# Altium PCB MotorX5.PcbDoc
Units mm, origin at the board's own origin, x right, y up, seen from the top; angles counter-clockwise.
Board outline 36 x 80 mm, 2 copper layers (Top Layer, Bottom Layer); 45 components, 38 nets, 175 pads, 115 vias.
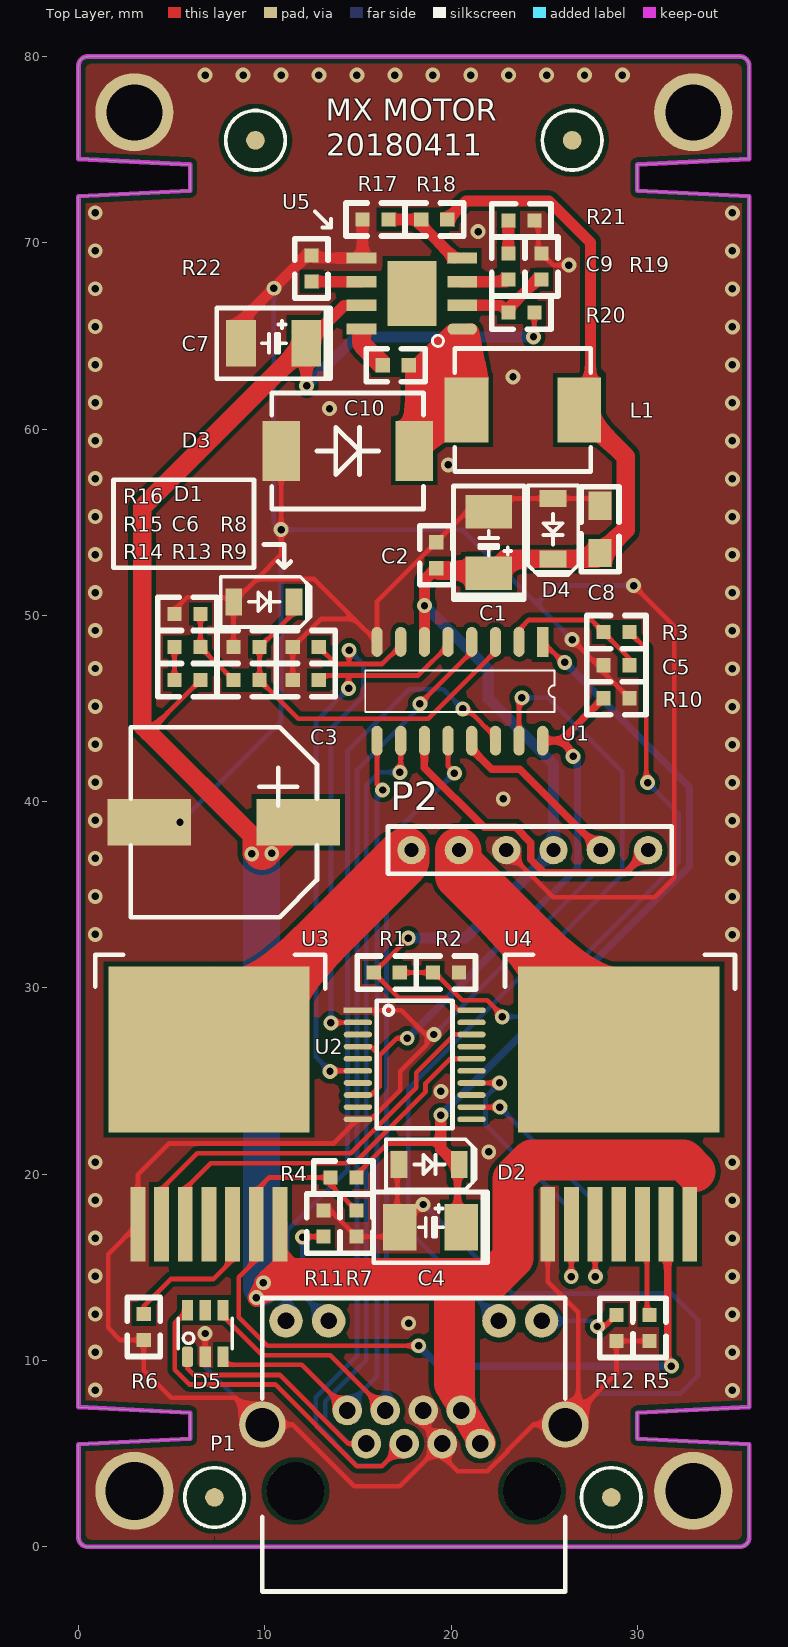
[diagram p0: Top Layer view]
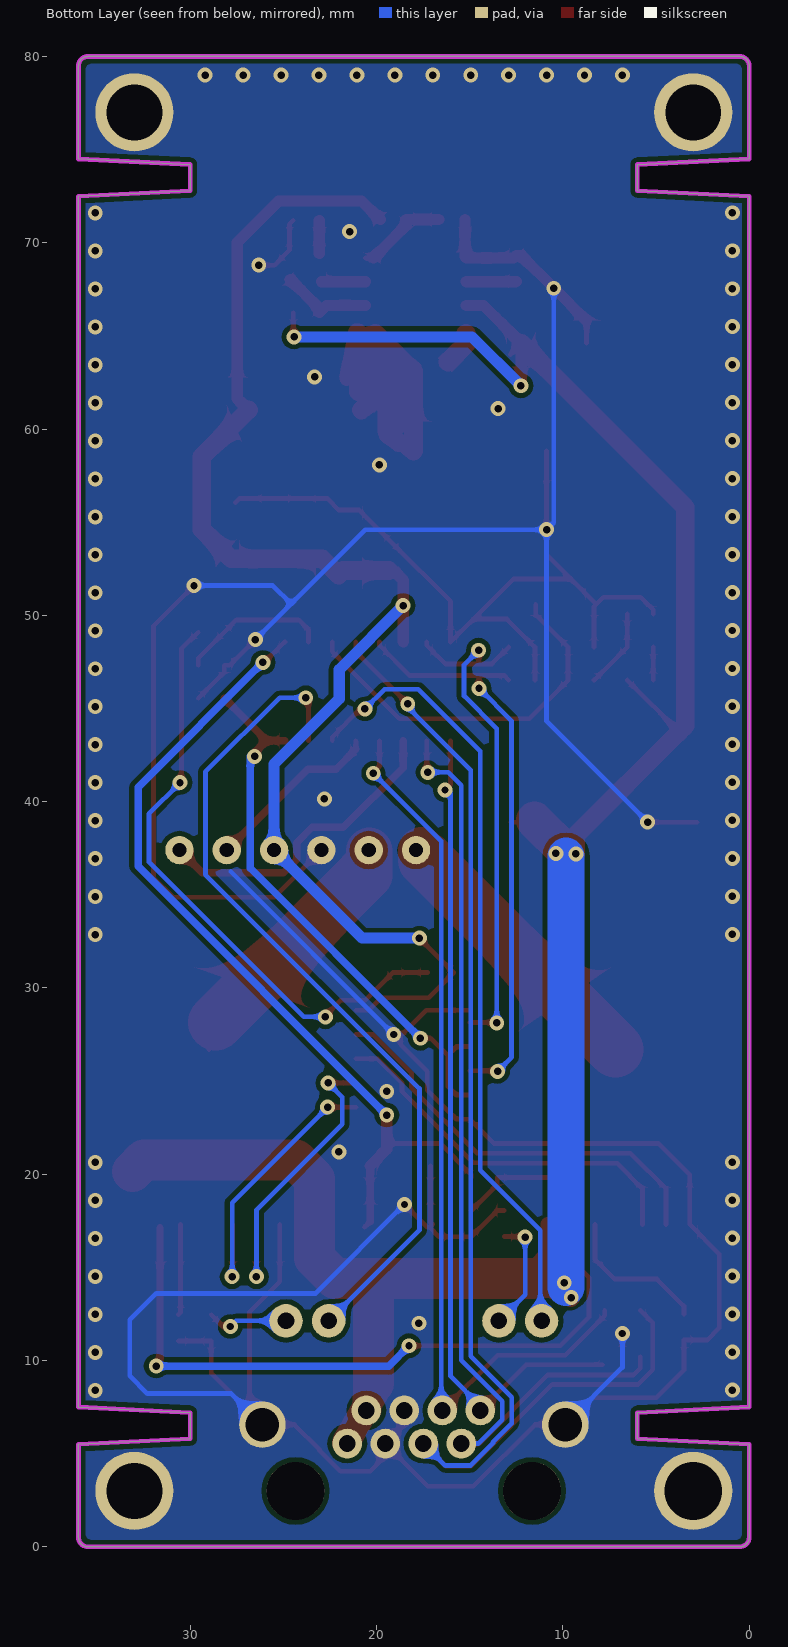
[diagram p1: Bottom Layer view, seen from below]

## Layer stack, top to bottom
Top Solder: solder mask 0.0102, Solder Resist, Dk 3.5
Top Layer: signal copper 0.0356
Dielectric 1: dielectric 0.32, FR-4, Dk 4.8
Bottom Layer: signal copper 0.0356
Bottom Solder: solder mask 0.0102, Solder Resist, Dk 3.5

## Board outline
0.5,0 cw(c0.5,0.5) 0,0.5 0,5.5 6,5.8 6,7.2 0,7.5 0,72.5 6,72.8 6,74.2 0,74.5 0,79.5 cw(c0.5,79.5) 0.5,80 35.5,80 cw(c35.5,79.5) 36,79.5 36,74.5 30,74.2 30,72.8 36,72.5 36,7.5 30,7.2 30,5.8 36,5.5 36,0.5 cw(c35.5,0.5) 35.5,0

## Design rules (kind name [scope] priority, off if disabled: settings)
Clearance [All] p1: gap=0.254 ignorepadtopadclearanceinfootprint=FALSE
ComponentClearance [All] p1 off: gap=0.254 collisioncheckmode=3 verticalgap=0.254 showdistances=FALSE
Height [All] p1 off: minheight=0 maxheight=25.4 prefheight=12.7
MinimumSolderMaskSliver [All] p1 off: minsoldermaskwidth=0.254
PlaneConnect [All] p1: planeconnectstyle=Direct reliefexpansion=0.508 reliefentries=4 reliefconductorwidth=0.254 reliefairgap=0.254
PolygonConnect [All] p1: connectstyle=Direct reliefconductorwidth=0.254 reliefentries=4 polygonreliefangle="90 Angle" airgapwidth=0.254
RoutingVias [All] p1: holewidth=1.5 width=1 viastyle="Through Hole" minholewidth=0.3 minwidth=0.8 maxholewidth=5 maxwidth=10
SilkToSilkClearance [All] p1 off: silktosilkclearance=0.254
SilkToSolderMaskClearance [IsPad] p1 off: minsilkscreentomaskgap=0.254 clearancetoexposedcopper=TRUE
SolderMaskExpansion [All] p1: expansion=0.102
Width [All] p1: maxlimit=5 minlimit=0.254 preferedwidth=0.254
24 further rules are at their usual default settings.

## Components (designator, comment, footprint, x,y, rotation, side; value= is the part's Value field where it differs from the comment)
C1 "10V 47uF 3528" 贴片电容3528_2#1 22.025,53.9 r90 top
C2 "0.01uF 0603" 0603 19.2,52.525 r90 top
C3 "cap贴片电解电容" 贴片电解电容（10*10.2mm） 7.8,38.9 r0 top locked
C4 "25V 10uF 3528" 贴片电容3528_2#1 18.9,17.15 r180 top
C5 "Cap" 0603 28.175,47.325 r0 top value=150pF
C6 "Cap" 0603 8.322,48.3 r0 top value=150pF
C7 "25V 10uF 3528" 贴片电容3528_2#2 10.475,64.6 r180 top
C8 "Cap" 0805 28,55.89 r270 top value="22uF 10V"
C9 "Cap" 0603 23.075,69.425 r270 top value=150pF
C10 "Cap" 0603 16.328,63.425 r0 top value=100nf
D1 "MMSZ5231B E1(5V1)" SOD-123_5 9.95,50.725 r0 top
D2 "MMSZ5231B E1(5V1)" SOD-123_5 18.825,20.525 r0 top
D3 "SK34" SK34 14.45,58.825 r0 top
D4 "MMSZ5231B E1(5V1)" SOD-123_5 25.475,54.65 r270 top
D5 "SRV05-4" sot-23-6(SRV05-4) 6.8,11.45 r0 top
L1 "15UH" 0630功率电感 23.85,61.025 r0 top
P1 "RJ45带扣带灯2" RJ45带扣带灯_2 18,3 r0 top locked
P2 "motor port" 2.54排针 24.23,37.4 r0 top
R1 "Res" 0603 17.25,30.825 r180 top value="热敏电阻10K NCP18XH103F03RB"
R2 "Res" 0603 20.425,30.825 r180 top value=10K
R3 "Res" 0603 29.572,49.1 r180 top value=1K
R4 "Res" 0603 13.525,19.825 r0 top value=1K
R5 "Res" 0603 30.65,11.053 r90 top value=1K
R6 "Res" 0603 3.5,11.1 r90 top value=1K
R7 "Res" 0603 14.925,16.65 r90 top value=10K
R8 "Res" 0603 11.5,48.3 r0 top value=1K
R9 "Res" 0603 11.503,46.525 r0 top value=1K
R10 "Res" 0603 29.575,45.55 r180 top value=1K
R11 "Res" 0603 13.15,16.653 r90 top value=1K
R12 "Res" 0603 28.875,12.45 r270 top value=1K
R13 "Res" 0603 8.325,46.525 r0 top value=1K
R14 "Res" 0603 5.15,46.525 r0 top value=10K
R15 "Res" 0603 6.547,48.3 r180 top value=10K
R16 "Res" 0603 5.15,50.075 r0 top value=10K
R17 "Res" 0603 15.25,71.25 r0 top value=40.2k
R18 "Res" 0603 18.403,71.25 r0 top value=210k
R19 "Res" 0603 24.85,69.425 r270 top value=24.9k
R20 "Res" 0603 23.075,66.25 r0 top value=100k
R21 "Res" 0603 24.472,71.2 r180 top value=100k
R22 "Res" 0603 12.5,69.322 r270 top value=100k
U1 "STC15W401AS_SOP16_DIP16" SOP16 24.92,48.575 r270 top
U2 "74HC244" TSSOP-20 15,28.8 r0 top
U3 "BTS 7960" TO-263-7 7,22 r0 top locked
U4 "BTS 7960" TO-263-7 29,22 r0 top locked
U5 "MP1584EN" MP1584EN 17.9,67.275 r90 top

## Footprints (in the part's own frame and the unit in brackets; to place one, negate y for a bottom-side part, rotate by r counter-clockwise, add the part's x,y. Pads: shape width x height; smd on the part's side, far side on the other; paste and mask are expansions set on the pad)
2.54排针 [mil]
  round 60 hole 30: 1(-250,0) 2(-150,0) 3(-50,0) 4(50,0) 5(150,0) 6(250,0)
  silkscreen extent -300,-50 300,50
0603 [mil]
  rect 30x30 smd: 1(0,0) 2(55,0)
  silkscreen extent -35,-35 90,35
0630功率电感 [mm]
  rect 2.35x3.5 smd: 1(-3.025,0) 2(3.025,0)
  silkscreen extent -3.65,-3.3 3.65,3.3
0805 [mm]
  rect 1.524x1.25 smd: 1(0,0) 2(2.54,0)
  silkscreen extent -1.02,-1.02 3.56,1.02
MP1584EN [mm]
  rect 3.51x2.62 smd: 0(0,0)
  oval 0.61x1.6 smd: 1(-1.905,-2.7)
  rect 0.61x1.6 smd: 2(-0.635,-2.7) 3(0.635,-2.7) 4(1.905,-2.7) 5(1.905,2.7) 6(0.635,2.7) 7(-0.635,2.7) 8(-1.905,2.7)
  silkscreen extent -2.84,-1.7 -2.24,-1.1
RJ45带扣带灯_2 [mm]
  round 3.1 hole 3.1: 0(-6.35,0) 0(6.35,0)
  round 1.6 hole 0.9: 1(3.57,2.54) 2(2.55,4.32) 3(1.53,2.54) 4(0.51,4.32) 5(-0.51,2.54) 6(-1.53,4.32) 7(-2.55,2.54) 8(-3.57,4.32)
  round 1.8 hole 0.89: 9(6.86,9.13) 10(4.57,9.13) 11(-4.57,9.13) 12(-6.86,9.13)
  round 2.5 hole 1.8: 13(-8.13,3.56) 13(8.13,3.56)
  silkscreen extent -8.13,-5.4 8.13,10.35
SK34 [mm]
  rect 2x3.2 smd: 1(-3.57,0) 2(3.57,0)
  silkscreen extent -4.07,-3.11 4.07,3.11
SOD-123_5 [mm]
  rect 0.9x1.45 smd: 1(-1.62,0) 2(1.62,0)
  silkscreen extent -2.32,-1.35 2.5,1.35
SOP16 [mm]
  rect 1.6x0.6 smd: 1(0,0)
  oval 1.6x0.6 smd: 2(0,-1.27) 3(0,-2.54) 4(0,-3.81) 5(0,-5.08) 6(0,-6.35) 7(0,-7.62) 8(0,-8.89) 9(5.3,-8.89) 10(5.3,-7.62) 11(5.3,-6.35) 12(5.3,-5.08) 13(5.3,-3.81) 14(5.3,-2.54) 15(5.3,-1.27) 16(5.3,0)
  silkscreen extent 1.53,-9.53 3.77,0.64
sot-23-6(SRV05-4) [mm]
  rrect50% 0.6x1.1 smd: 1(-0.95,-1.25)
  rect 0.6x1.1 smd: 2(0,-1.25) 3(0.95,-1.25) 4(0.95,1.25) 5(0,1.25) 6(-0.95,1.25)
  silkscreen extent -1.45,-0.8 1.45,0.8
TO-263-7 [mm]
  rect 0.8x4 smd: 1(-3.81,-4.697) 2(-2.54,-4.697) 3(-1.27,-4.697) 4(0,-4.697) 5(1.27,-4.697) 6(2.54,-4.697) 7(3.81,-4.697)
  rect 10.8x8.89 smd: 8(0,4.697)
  silkscreen extent -6.1,7.97 6.24,9.78
TSSOP-20 [mil]
  rect 60x12 smd: 1(0,0)
  oval 60x12 smd: 2(0,-25.59) 3(0,-51.18) 4(0,-76.77) 5(0,-102.36) 6(0,-127.95) 7(0,-153.54) 8(0,-179.13) 9(0,-204.72) 10(0,-230.32) 11(240.16,-230.32) 12(240.16,-204.72) 13(240.16,-179.13) 14(240.16,-153.54) 15(240.16,-127.95) 16(240.16,-102.36) 17(240.16,-76.77) 18(240.16,-51.18) 19(240.16,-25.59) 20(240.16,0)
  silkscreen extent 40,-249 200,20
贴片电容3528_2#1 [mm]
  rect 1.8x2.5 smd: 1(-1.65,0) 2(1.65,0)
  silkscreen extent -3.05,-1.9 3.05,1.9
贴片电容3528_2#2 [mm]
  rect 1.6x2.5 smd: 1(-1.75,0) 2(1.75,0)
  silkscreen extent -3.05,-1.9 3.05,1.9
贴片电解电容（10*10.2mm） [mm]
  rect 4.5x2.5 smd: 1(-4,0) 2(4,0)
  silkscreen extent -5,-5.1 5,5.1

## Part data
C1 C4 C7: library part 电容
C2: library part Cap, "Capacitor", LatestRevisionDate=17-Jul-2002, LatestRevisionNote="Re-released for DXP Platform.", PackageDescription="Radial Cap, Thru-Hole; 2 Leads; 0.3 in Pin Spacing", PackageReference=RAD-0.3, Published=8-Jun-2000, Publisher="Altium Limited"
C3: library part cap贴片电容, ="330uF 50V"
C5 C6 C8 C9 C10: "Capacitor", LatestRevisionDate=17-Jul-2002, LatestRevisionNote="Re-released for DXP Platform.", PackageReference=RAD-0.3, Published=8-Jun-2000, Publisher="Altium Limited"
D1 D2 D4: library part "Diode 1N4148", "High Conductance Fast Diode", Code_JEDEC=DO-204-AH, ComponentLink1Description="Manufacturer Link", ComponentLink1URL=http://www.fairchildsemi.com/, ComponentLink2Description=Datasheet, ComponentLink2URL=http://www.fairchildsemi.com/ds/1N%2F1N4148.pdf, DatasheetVersion=1997, LatestRevisionDate=17-Jul-2002, LatestRevisionNote="Re-released for DXP Platform.", PackageReference=DO-35, Published=8-Jun-2000, Publisher="Altium Limited"
L1: library part 0630功率电感
R1 R2 R3 R4 R5 R6 R7 R8 R9 R10 R11 R12 R13 R14 R15 R16 R17 R18 R19 R20 R21 R22: library part Res2, "Resistor", LatestRevisionDate=17-Jul-2002, LatestRevisionNote="Re-released for DXP Platform.", PackageReference=AXIAL-0.4, Published=8-Jun-2000, Publisher="Altium Limited"
U5: library part Component_1

## Free pads (board coordinates)
  round 4.2 hole 3.1: 0(3,3)
  round 4.2 hole 3: 0(3,77) 0(33,3) 0(33,77)
  round 1 smd: 0(7.3,2.65) 0(9.5,75.5) 0(26.5,75.5) 0(28.6,2.65)
  round 3 on Top Solder: 0(7.3,2.65) 0(9.5,75.5) 0(26.5,75.5) 0(28.6,2.65)

## Via types
v1: diameter 0.8, hole 0.4, Top Layer to Bottom Layer, 115 vias

## Nets (pads, with @x,y where several pads share a name; then routed paths per layer and width w, separated by ;. In a path a pad name is that pad's centre, name@x,y a point inside that pad or via, vN(x,y) a via of type N, cw(c..) or ccw(c..) an arc to the next point about the centre after c; other vN are vias at no path point)
5V: C1.1 C2.1 C8.2 D4.2 L1.2 P2.4 R1.2 R18.2 U1.6 U2.20 | length 75.5
  Top Layer w0.254: v1(17.7,32.675) 15.853,30.828 R1.2 17.203,29.475 19.75,29.475 20.425,28.8 U2.20 ; C1.1@21.8,52.375 C1.1@22.025,52.15
  Top Layer w0.6: U1.6 18.57,51.895 C2.1 ; R18.2 20.8,72.25 25.25,72.25 27.479,70.021 27.479,61.629 L1.2
  Top Layer w1: C2.1@19.35,52.41 C1.1@21.8,52.41 ; C1.1@22.025,52.15 22.905,53.03 D4.2 27.805,53.03 29.379,54.604 29.379,58.521 L1.2
  Bottom Layer w0.6: v1(17.7,32.675) 20.775,32.675 P2.4 25.5,42.025 22,45.525 22,47.1 v1(18.575,50.525)
12V: C3.2 C7.1 P1.1 P1.2 R14.2 R20.2 U3.7 U4.7 U5.7 | length 132.1
  Top Layer w0.254: 3.647,43.625 3.761,43.739 R14.2 R14.2@6.547,46.522 ; 10.475,14.725 11.3,14.725 10.81,15.215 ; C3.2@12.05,38.9 C3.2@12.8,38.9 ; C7.1 C7.1@12.825,64 ; 20.425,14.404 20.55,14.279 ; P1.2@21.146,7.226 21.146,8.98 ; v1@24.472,64.95 R20.2
  Top Layer w0.6: v1@12.225,62.325 C7.1 14.265,66.64 U5.7
  Top Layer w0.8: 10.81,15.215 U3.7 ; U3.7@11.01,15.453 11.75,14.85
  Top Layer w1: v1(9.3,37.2) 9.3,38.2 3.761,43.739 3.425,44.075 3.425,55.8 C7.1 ; v1(9.925,14.175) 9.975,14.225 9.947,14.165 9.575,13.375 10.159,13.623 11.225,14.075 ; v1@10.075,14.35 10.675,14.925 ; 10.9,13.85 11.6,13.85
  Top Layer w1.5: 19.989,8.422 20.624,7.385 20.634,7.367 21.644,5.585 P1.1@21.65,5.575 ; P1.2@20.495,7.34 20.552,7.329 P1.2@20.568,7.326 ; P1.1@21.618,5.569 P1.1@21.62,5.565
  Top Layer w2: 9.85,37.325 C3.2@11.525,39
  Top Layer w2.2: 11.621,14.404 20.175,14.404 ; 20.175,8.775 20.175,14.404 ; 33.1,20.15 32.475,20.775 24.345,20.775 23.325,19.755 23.325,15.5 22.229,14.404 20.425,14.404 20.175,14.404
  Bottom Layer w0.6: v1(12.25,62.325) 14.875,64.95 v1(24.425,64.95)
  Bottom Layer w2: v1@9.825,13.925 9.825,37.075
  other v1: 9.55,13.375 10.375,37.225
AD0: C4.1 D2.2 R4.2 U1.1 | length 46.1
  Top Layer w0.254: R4.2 14.922,19.981 16.591,21.65 19.45,21.65 ; C4.1@20.345,17.455 C4.1@20.65,17.15 ; U1.1 26.02,47.475 v1(26.1,47.475)
  Top Layer w0.4: C4.1@20.345,17.455 D2.2@20.345,20.45
  Top Layer w0.6: v1(19.45,23.175) 19.45,21.65 19.45,21.345 D2.2@20.345,20.45
  Bottom Layer w0.4: v1(19.45,23.175) 32.8,36.525 32.8,40.775 v1(26.1,47.475)
AD1: C5.2 R3.2 U1.2 | length 8
  Top Layer w0.254: U1.2 23.65,49.225 24.181,49.756 27.519,49.756 R3.2 29.569,47.706 C5.2@29.569,47.325
AD2: C6.2 D1.2 R13.2 U1.3 | length 20.3
  Top Layer w0.254: D1.2@11.45,50.6 11.45,50.031 C6.2 9.722,48.297 R13.2 11.791,44.456 18.781,44.456 22.38,48.055 U1.3
GND: C1.2 C2.2 C3.1 C4.2 C5.1 C6.1 C7.2 C8.1 D1.1 D2.1 D3.1 D4.1 D5.2 P1.3 P1.4 P1.13 P2.3 pad.0@3,3 pad.0@3,77 pad.0@33,3 pad.0@33,77 R2.1 R5.1 R6.1 R7.1 R8.1 R9.1 R10.1 R11.2 R12.2 R16.1 R17.1 R19.1 R21.1 R22.1 U1.8 U2.1 U2.10 U3.1 U4.1 U5.5 | length 292.4
  Top Layer w0.254: C3.1@2.8,38.9 C3.1 v1(5.45,38.9) ; R16.1 5.15,50.3 5.825,50.975 7.835,50.975 D1.1@8.21,50.6 ; D5.2 v1(6.8,11.45) ; C6.1 8.322,50.488 D1.1@8.21,50.6 ; C7.2 C7.2@8.725,65.8 ; D3.1 10.88,53.27 9.56,51.95 ; R9.1 11.5,46.528 R8.1 13,49.8 14.805,49.8 ; R22.1 R22.1@12.642,69.18 ; R11.2 13.525,18.05 R7.1 16.65,16.65 C4.2@17.15,17.15 ; U2.1 17.325,28.8 18.7,27.425 18.7,26.95 17.275,25.525 17.275,24.511 15.714,22.95 U2.10 13.7,21.65 4.875,21.65 3.19,19.965 U3.1 1.6,15.713 1.6,11.75 2.25,11.1 R6.1 3.5,9.475 4.975,8 8.43,8 9.87,6.56 11.49,6.56 14.8,3.25 17.24,3.25 P1.3 ; U5.5 U5.5@15.25,69.23 ; D2.1@17.105,20.45 17.105,17.43 16.988,17.313 C4.2@17.15,17.15 ; v1(18.5,18.375) 17.275,17.15 C4.2 C4.2@17.15,17.15 ; P1.4 18.51,6.56 P1.3 ; P2.3 P2.3 25.484,34.875 30.925,34.875 31.975,35.925 31.975,49.425 v1(29.8,51.6) ; R21.1 24.675,70.997 24.675,69.6 R19.1 25.475,68.8 v1(26.325,68.8) ; U4.1 25.19,14.235 26.825,12.6 P1.13@26.825,7.255 ; v1(26.5,48.7) 27.875,47.325 C5.1@28.172,47.325 ; C8.1@27.575,56.05 27.35,56.275 22.65,56.275 22.025,55.65 20.928,55.65 C2.2 16.03,50.752 U1.8 14.805,49.8 ; C5.1 C5.1@28.172,47.325 ; R10.1@29.572,45.55 28.172,46.95 C5.1@28.172,47.325 ; R5.1 R12.2 28.875,9.305 P1.13@26.825,7.255 ; D1.1@8.21,50.6 9.56,51.95 ; 9.56,51.95 12.655,51.95 14.805,49.8 ; P1.3 19.53,4.87 20.35,4.05 21.952,4.05 23.062,5.16 23.062,5.212 24.41,6.56 26.13,6.56 P1.13@26.825,7.255
  Top Layer w0.6: C7.2@8.725,65.8 v1(10.486,67.561) 12.247,69.322 R22.1 ; R22.1@12.642,69.18 U5.5 ; U5.5@15.25,69.23 R17.1
  Bottom Layer w0.254: v1(5.45,38.9) 10.875,44.325 v1(10.875,54.6) ; v1(6.8,11.45) 6.8,9.63 P1.13@9.87,6.56 ; v1(10.486,67.561) 10.486,54.989 v1(10.875,54.6) ; v1(18.5,18.375) 23.275,13.6 31.825,13.6 33.25,12.175 33.25,9.175 32.3,8.225 27.795,8.225 P1.13@26.13,6.56 ; v1(19.075,27.5) 27.825,36.25 ; v1(26.5,48.7) 24.587,50.612 ; v1(29.8,51.6) 25.575,51.6 24.587,50.612 ; v1(10.875,54.6) 20.6,54.6 24.587,50.612
  other v1: 0.9,8.411 35.1,8.4 0.9,10.45 35.1,10.439 17.725,12 35.1,12.477 0.9,12.489 0.9,14.527 35.1,14.516 0.9,16.566 35.1,16.555 0.9,18.605 35.1,18.594 35.1,20.632 0.9,20.644 22.025,21.2 19.45,24.45 0.9,32.877 35.1,32.864 35.1,34.903 0.9,34.915 35.1,36.942 0.9,36.954 0.9,38.993 35.1,38.981 22.8,40.15 0.9,41.031 35.1,41.019 35.1,43.058 0.9,43.07 35.1,45.097 0.9,45.109 0.9,47.148 35.1,47.135 0.9,49.186 35.1,49.174 35.1,51.213 0.9,51.225 0.9,53.264 35.1,53.252 0.9,55.302 35.1,55.29 35.1,57.329 0.9,57.341 19.85,58.075 35.1,59.368 0.9,59.38 13.475,61.1 0.9,61.419 35.1,61.406 23.325,62.8 0.9,63.457 35.1,63.445 35.1,65.484 0.9,65.496 35.1,67.523 0.9,67.535 0.9,69.573 35.1,69.561 21.45,70.6 0.9,71.612 35.1,71.6 6.8,79 8.836,79 10.873,79 12.909,79 14.945,79 16.982,79 19.018,79 21.055,79 23.091,79 25.127,79 27.164,79 29.2,79
IO_R: D5.4 P1.6 U1.12 | length 48.8
  Top Layer w0.254: D5.4 7.75,12.4 9.867,10.283 13.507,10.283 P1.6 ; U1.12 19.84,41.91 20.175,41.575 v1(20.175,41.525)
  Bottom Layer w0.254: P1.6 16.533,7.383 16.533,37.883 v1(20.175,41.525)
IO_T: D5.6 P1.5 U1.4 | length 70.1
  Top Layer w0.254: D5.6 5.169,12.019 5.169,9.506 5.958,8.717 10.558,8.717 14.95,4.325 16.275,4.325 P1.5 ; v1(18.325,45.25) 21.11,48.035 U1.4
  Bottom Layer w0.254: P1.5 16.309,4.359 14.961,4.359 13.75,5.57 13.75,5.611 12.741,6.62 12.741,8.02 14.946,10.225 14.946,41.696 18.325,45.075 v1(18.325,45.25)
MotorA: P2.5 U1.13 | length 9.6
  Top Layer w0.254: U1.13@21.11,42.815 U1.13
  Top Layer w0.4: U1.13@21.11,42.815 22.175,41.75 23.69,41.75 P2.5
MotorB: P2.6 U1.11 | length 16.8
  Top Layer w0.4: U1.11 18.57,41.83 21.784,38.616 23.464,38.616 24.284,37.796 24.284,36.896 24.996,36.184 29.364,36.184 P2.6
motorL: R9.2 U1.5 U2.6 | length 31.7
  Top Layer w0.254: R9.2 13.15,46.775 14.525,46.775 ; v1(13.5,25.525) 13.525,25.55 U2.6 ; v1(14.5,46.075) 14.5,46.75 14.525,46.775 ; U1.5 19.84,48.382 18.233,46.775 14.525,46.775
  Bottom Layer w0.254: v1(13.5,25.525) 12.75,26.275 12.75,44.325 v1(14.5,46.075)
motorR: R8.2 U1.7 U2.2 | length 28.6
  Top Layer w0.254: R8.2 13.803,47.394 14.55,47.394 ; v1(13.55,28.125) 13.575,28.15 U2.2 ; v1(14.525,48.125) 14.525,47.419 14.55,47.394 ; U1.7 17.3,48.382 16.312,47.394 14.55,47.394
  Bottom Layer w0.254: v1(13.55,28.125) 13.55,43.925 15.3,45.675 15.3,47.35 v1(14.525,48.125)
NetC9_1: C9.1 R21.2 | length 1.8
  Top Layer w0.6: C9.1 R21.2
NetC9_2: C9.2 U5.3 | length 2.5
  Top Layer w0.254: C9.2@22.957,67.91 C9.2
  Top Layer w0.6: U5.3 C9.2@22.957,67.91
NetC10_1: C10.1 U5.8 | length 2
  Top Layer w1: U5.8@15.2,65.15 15.2,64.553 C10.1@16.164,63.589
NetC10_2: C10.2 D3.2 L1.1 U5.1 | length 30.3
  Top Layer w0.254: C10.2 18.35,63.425 ; D3.2 D3.2@18.625,58.825 ; 18.35,63.175 18.35,63.425 ; 18.425,63.425 18.35,63.425 ; L1.1@20.125,61.025 L1.1
  Top Layer w0.8: U5.1@21.1,65.275 L1.1@21.6,62.725
  Top Layer w1: D3.2 18.02,63.095 18.35,63.425 U5.1@20.075,65.15 ; 18.425,63.425 19.55,62.3 ; D3.2@18.8,59.275 19.4,59.711 ; D3.2@18.875,60.175 18.875,62.575 ; 19.45,59.886 19.45,62.075 ; 19.55,61.25 19.55,62.3 ; 19.55,64.425 19.55,62.3 ; L1.1@20.375,61.85 20.375,65.025 ; L1.1 19.55,62.3 ; L1.1@20.975,62 U5.1@20.975,65.175
NetP1_9: P1.9 R12.1 | length 4.9
  Top Layer w0.254: P1.9 P1.9@25.18,12.45 ; v1(27.85,11.825) 28.25,11.825 R12.1
  Bottom Layer w0.254: P1.9 27.545,12.13 v1(27.85,11.825)
NetP1_11: P1.11 R11.1 | length 6.2
  Top Layer w0.254: v1(12.025,16.625) 12.053,16.653 R11.1
  Bottom Layer w0.254: v1(12.025,16.625) 12.025,13.535 P1.11
NetP2_1: P2.1 U3.8 | length 15.2
  Top Layer w0.254: U3.8 U3.8@7.177,26.696
  Top Layer w2.5: 17.34,36.86 17.597,37.121 P2.1@17.595,37.385
  Top Layer w3: U3.8@7.177,26.696 17.34,36.86
NetP2_2: P2.2 U4.8 | length 14.8
  Top Layer w0.254: U4.8 U4.8@29,28.82
  Top Layer w2.5: P2.2@20.39,37.36 20.4,36.025
  Top Layer w3: 20.64,36.135 U4.8@28.63,28.145
NetR1_1: R1.1 R2.2 R3.1 | length 32.5
  Top Layer w0.254: R1.1 R2.2 19.118,30.825 20.61,29.333 21.931,29.333 22.75,28.514 v1(22.75,28.45) ; R3.1 30.475,48.197 v1@30.475,41.35
  Bottom Layer w0.254: v1(22.75,28.45) 23.903,28.45 32.219,36.766 32.219,39.356 v1(30.55,41.025)
NetR4_1: R4.1 R7.2 U3.6 U4.6 | length 45.7
  Top Layer w0.254: R7.2 13.525,19.447 R4.1 10.25,19.825 9.54,19.115 U3.6 9.54,15.415 8.6,14.475 8.6,12.325 10.134,10.791 v1(18.259,10.791) ; v1@31.625,9.9 v1(31.825,9.7)
  Top Layer w0.4: v1@31.625,9.9 U4.6@31.625,17.138
  Bottom Layer w0.4: v1(18.259,10.791) 19.35,9.7 v1(31.825,9.7)
NetR5_2: R5.2 U4.5 | length 4.9
  Top Layer w0.254: U4.5@30.52,17.303 30.52,12.58 R5.2
NetR6_2: R6.2 U3.5 | length 8.1
  Top Layer w0.254: R6.2 3.5,12.925 4.95,14.375 7.225,14.375 8.27,15.42 U3.5
NetR13_1: R13.1 R15.1 R16.2 | length 4.3
  Top Layer w0.254: R16.2 R15.1 8.322,46.525 R13.1
NetR14_1: R14.1 R15.2 | length 1.8
  Top Layer w0.254: R14.1 R15.2
NetR17_2: R17.2 R18.1 U5.4 | length 5
  Top Layer w0.254: U5.4@20.17,69.18 U5.4
  Top Layer w0.6: R17.2 R18.1 18.403,70.947 U5.4@20.17,69.18
NetR19_2: R19.2 R20.1 U5.2 | length 5.3
  Top Layer w0.254: R19.2@24.628,68.028 R19.2
  Top Layer w0.6: U5.2 22.685,66.64 R20.1 23.075,66.475 R19.2@24.628,68.028
NetR22_2: R22.2 U5.6 | length 2.7
  Top Layer w0.6: R22.2 12.515,67.91 U5.6
NetU2_12: U2.12 U4.3 | length 15.6
  Top Layer w0.254: U2.12 v1(22.625,23.6) ; U4.3 27.73,14.52 v1(27.75,14.5)
  Bottom Layer w0.254: v1(22.625,23.6) 27.75,18.475 v1(27.75,14.5)
NetU2_14: U2.14 U4.2 | length 16.9
  Top Layer w0.254: U2.14 v1(22.6,24.9) ; v1(26.45,14.5) 26.46,14.51 U4.2
  Bottom Layer w0.254: v1(22.6,24.9) 21.844,24.144 21.844,22.681 26.45,18.075 v1(26.45,14.5)
NetU2_16: U2.16 U3.3 | length 20.4
  Top Layer w0.254: U3.3 5.73,19.23 7.087,20.587 14.337,20.587 14.367,20.617 14.818,20.617 18.633,24.432 18.633,24.883 19.95,26.2 U2.16
NetU2_18: U2.18 U3.2 | length 22.4
  Top Layer w0.254: U3.2 4.46,19.21 6.375,21.125 14.607,21.125 18.125,24.643 18.125,25.443 20.182,27.5 U2.18
PWM0: R10.2 U1.16 U2.4 U2.8 | length 30.5
  Top Layer w0.254: U2.8 15.714,24.25 16.175,24.711 16.175,26.389 ; U2.4 15.714,26.85 16.175,26.389 ; v1(17.65,27.3) 17.086,27.3 16.175,26.389 ; v1(26.55,42.425) v1@26.55,42.628
  Top Layer w0.4: U1.16 25.903,43.275 ; v1@26.55,42.628 25.903,43.275 ; R10.2 25.903,43.275
  Bottom Layer w0.4: v1(17.65,27.3) 26.786,36.436 v1@26.786,42.425
PWM1: P1.10 U1.15 | length 45.6
  Top Layer w0.254: U1.15 23.65,45.425 v1(23.8,45.575)
  Bottom Layer w0.254: P1.10 17.7,17 17.7,24.6 29.183,36.083 29.183,41.592 25.2,45.575 v1(23.8,45.575)
PWM2: P1.12 U1.14 | length 42.5
  Top Layer w0.254: v1(20.625,44.975) 20.873,44.975 22.38,43.468 U1.14
  Bottom Layer w0.254: P1.12 11.206,12.196 11.206,16.981 14.438,20.213 14.438,42.713 17.756,46.031 19.569,46.031 v1(20.625,44.975)
RxD: D5.3 P1.8 U1.9 | length 44.4
  Top Layer w0.254: D5.3@7.875,9.775 11.975,9.775 P1.8 ; U1.9 16.03,40.92 v1(16.325,40.625)
  Bottom Layer w0.254: P1.8 14.43,7.555 16.025,9.15 16.025,40.45 v1@16.191,40.616
TxD: D5.1 P1.7 U1.10 | length 53.4
  Top Layer w0.254: D5.1 5.85,9.575 6.2,9.225 10.8,9.225 14.485,5.54 P1.7 ; v1(17.25,41.575) 17.3,41.625 U1.10
  Bottom Layer w0.254: P1.7 14.54,5.54 13.249,6.831 13.249,7.809 15.454,10.014 15.454,40.879 16.15,41.575 v1(17.25,41.575)
pads on no net: D5.5 P1.0 U2.3 U2.5 U2.7 U2.9 U2.11 U2.13 U2.15 U2.17 U2.19 U3.4 U4.4 U5.0

## Polygon pours and split planes (outlines as drawn)
GND on Top Layer "Top G" (solid, remove dead copper, pour order 52): -2.1,82.275 39.6,82.275 39.6,-4.2 -0.575,-4.2 -1.825,-2.95
GND on Bottom Layer "Bottom G" (solid, remove dead copper, pour order 54): -2.65,82.875 -1.875,82.1 40.225,82.1 40.225,-0.975 38.05,-3.15 -2.25,-3.15

## Keep-outs
Keep-Out Layer:
  the board outline again, w0.254

## Silkscreen, mask and mechanical layers (free items; w line width, h text height)
Top Overlay:
  circle w0.2: c7.3,2.65 r1.6
  circle w0.2: c28.6,2.65 r1.6
  circle w0.2: c9.5,75.5 r1.6
  circle w0.2: c26.5,75.5 r1.6
  lines w0.2: 12.7,71.675 13.55,70.825 ; 13.1,70.825 13.55,70.825 ; 13.55,71.275 13.55,70.825
  lines w0.254: 9.95,53.8 11.05,53.8 11.05,52.55 ; 10.713,52.887 11.05,52.55 ; 11.387,52.887 11.05,52.55 ; 11.05,52.55 11.05,52.55 ; 1.875,52.55 1.875,57.275 9.425,57.275 9.425,52.55 1.875,52.55
  text "MX MOTOR" at 13.275,76.55 h1.2
  text "20180411" at 13.3,74.675 h1.2
Top Solder:
  rectangle: 30.2,74.425 35.8,80
  rectangle: 0.2,74.425 5.8,80
  rectangle: 0.2,0.1 5.8,5.525
  rectangle: 30.2,0.1 35.8,5.525
Bottom Solder:
  rectangle: 30.2,0.1 35.8,5.525
  rectangle: 0.2,0.1 5.8,5.525
  rectangle: 30.2,74.425 35.8,80
  rectangle: 0.2,74.425 5.8,80